# Altium PCB PCB_Project_2.PcbDoc (part 1 of 2)
Units mm, origin at the board's own origin, x right, y up, seen from the top; angles counter-clockwise.
Board outline 50 x 50 mm, 2 copper layers (TOP, BOT), stack 0.273 mm thick; 59 components, 39 nets, 183 pads, 58 vias.
Unrouted connection lines stored in the file: 41.
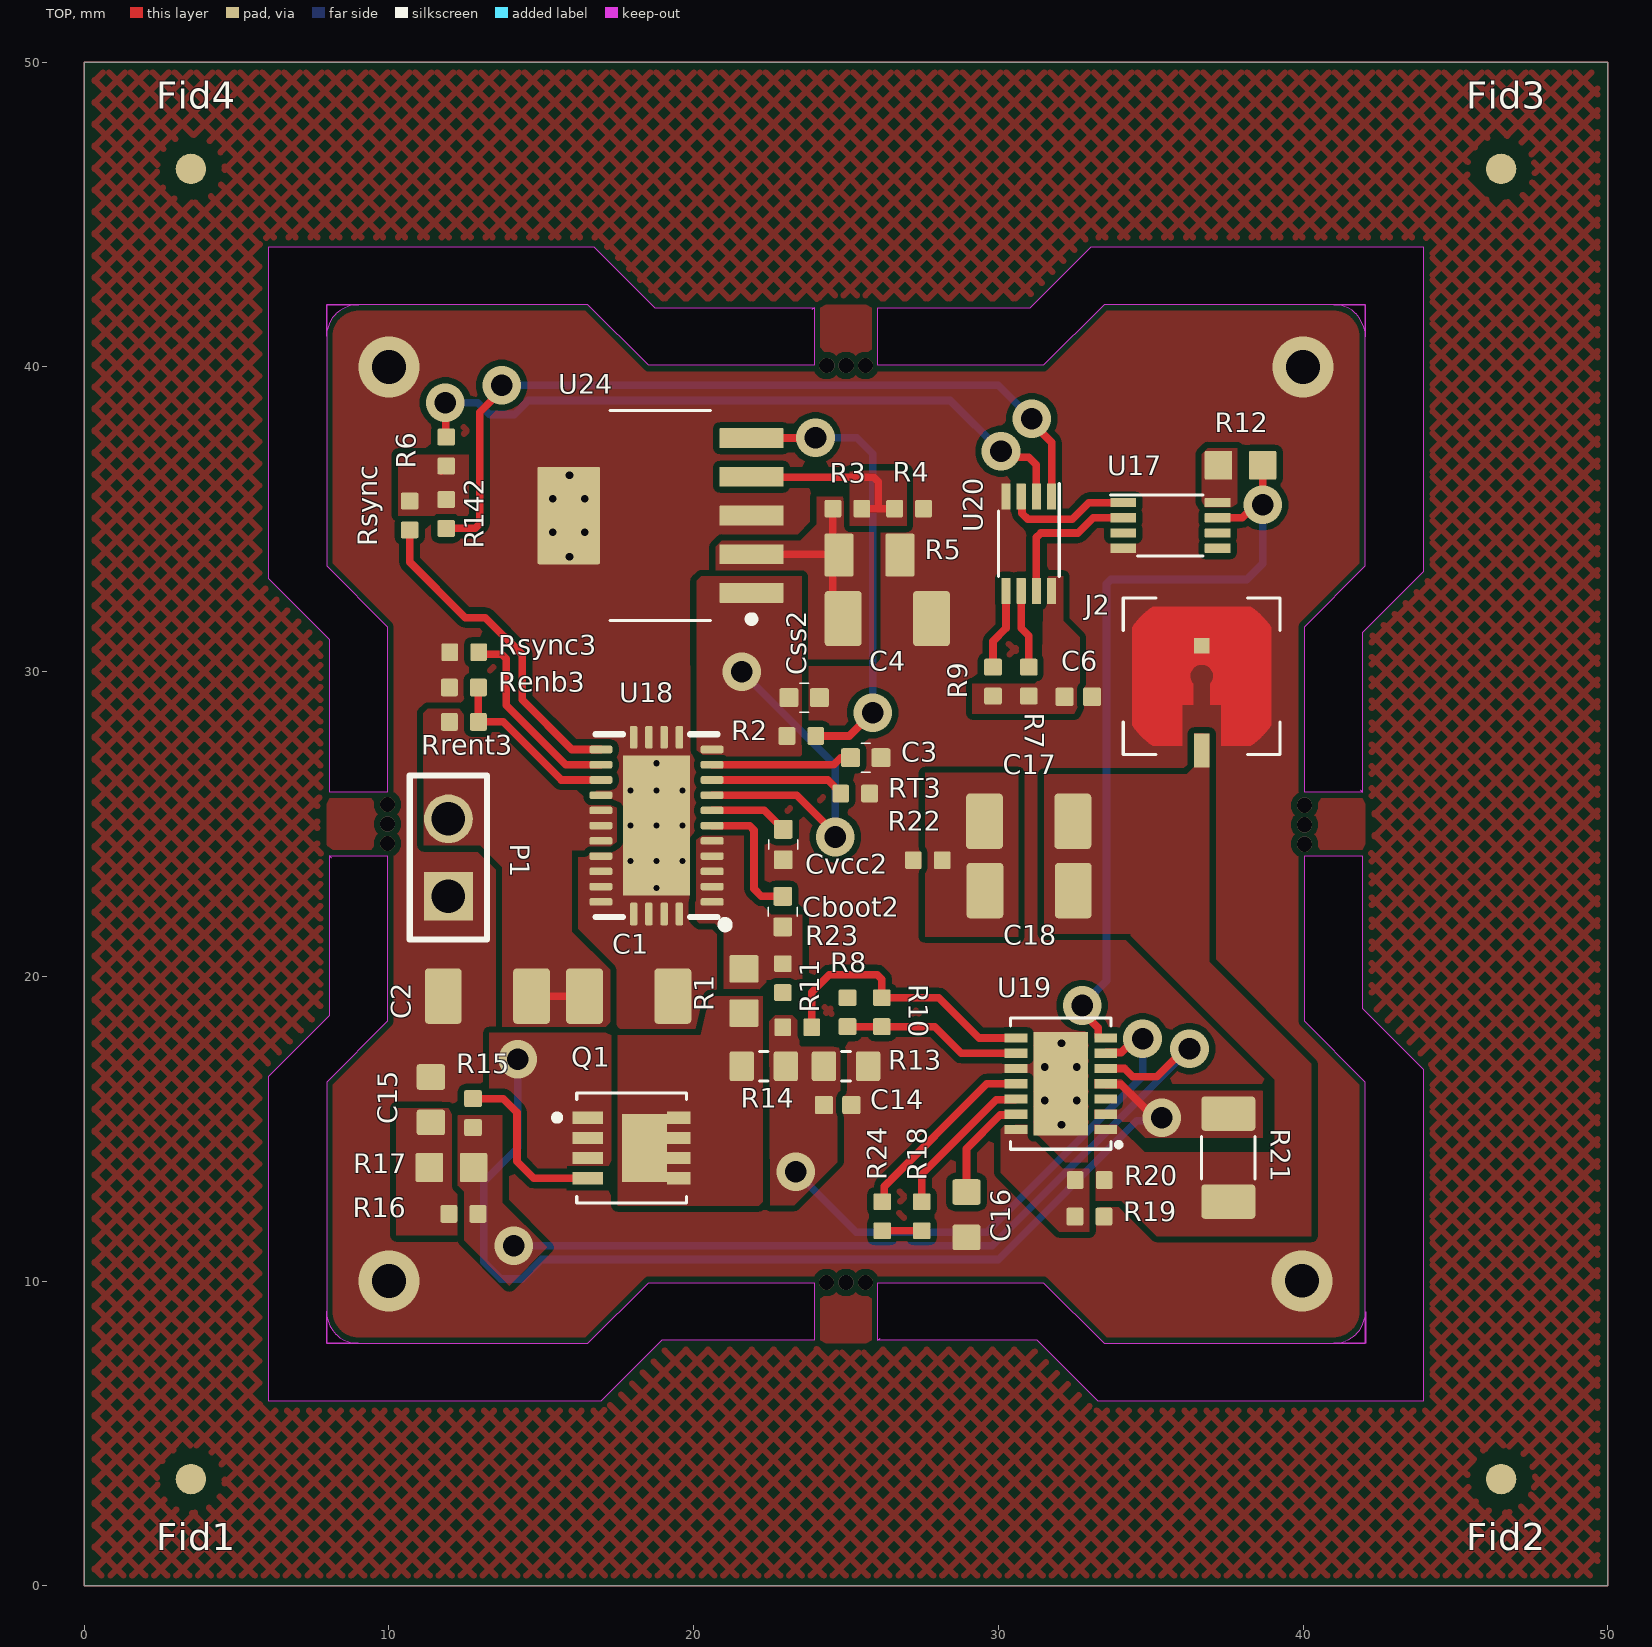
[diagram p0: TOP view]
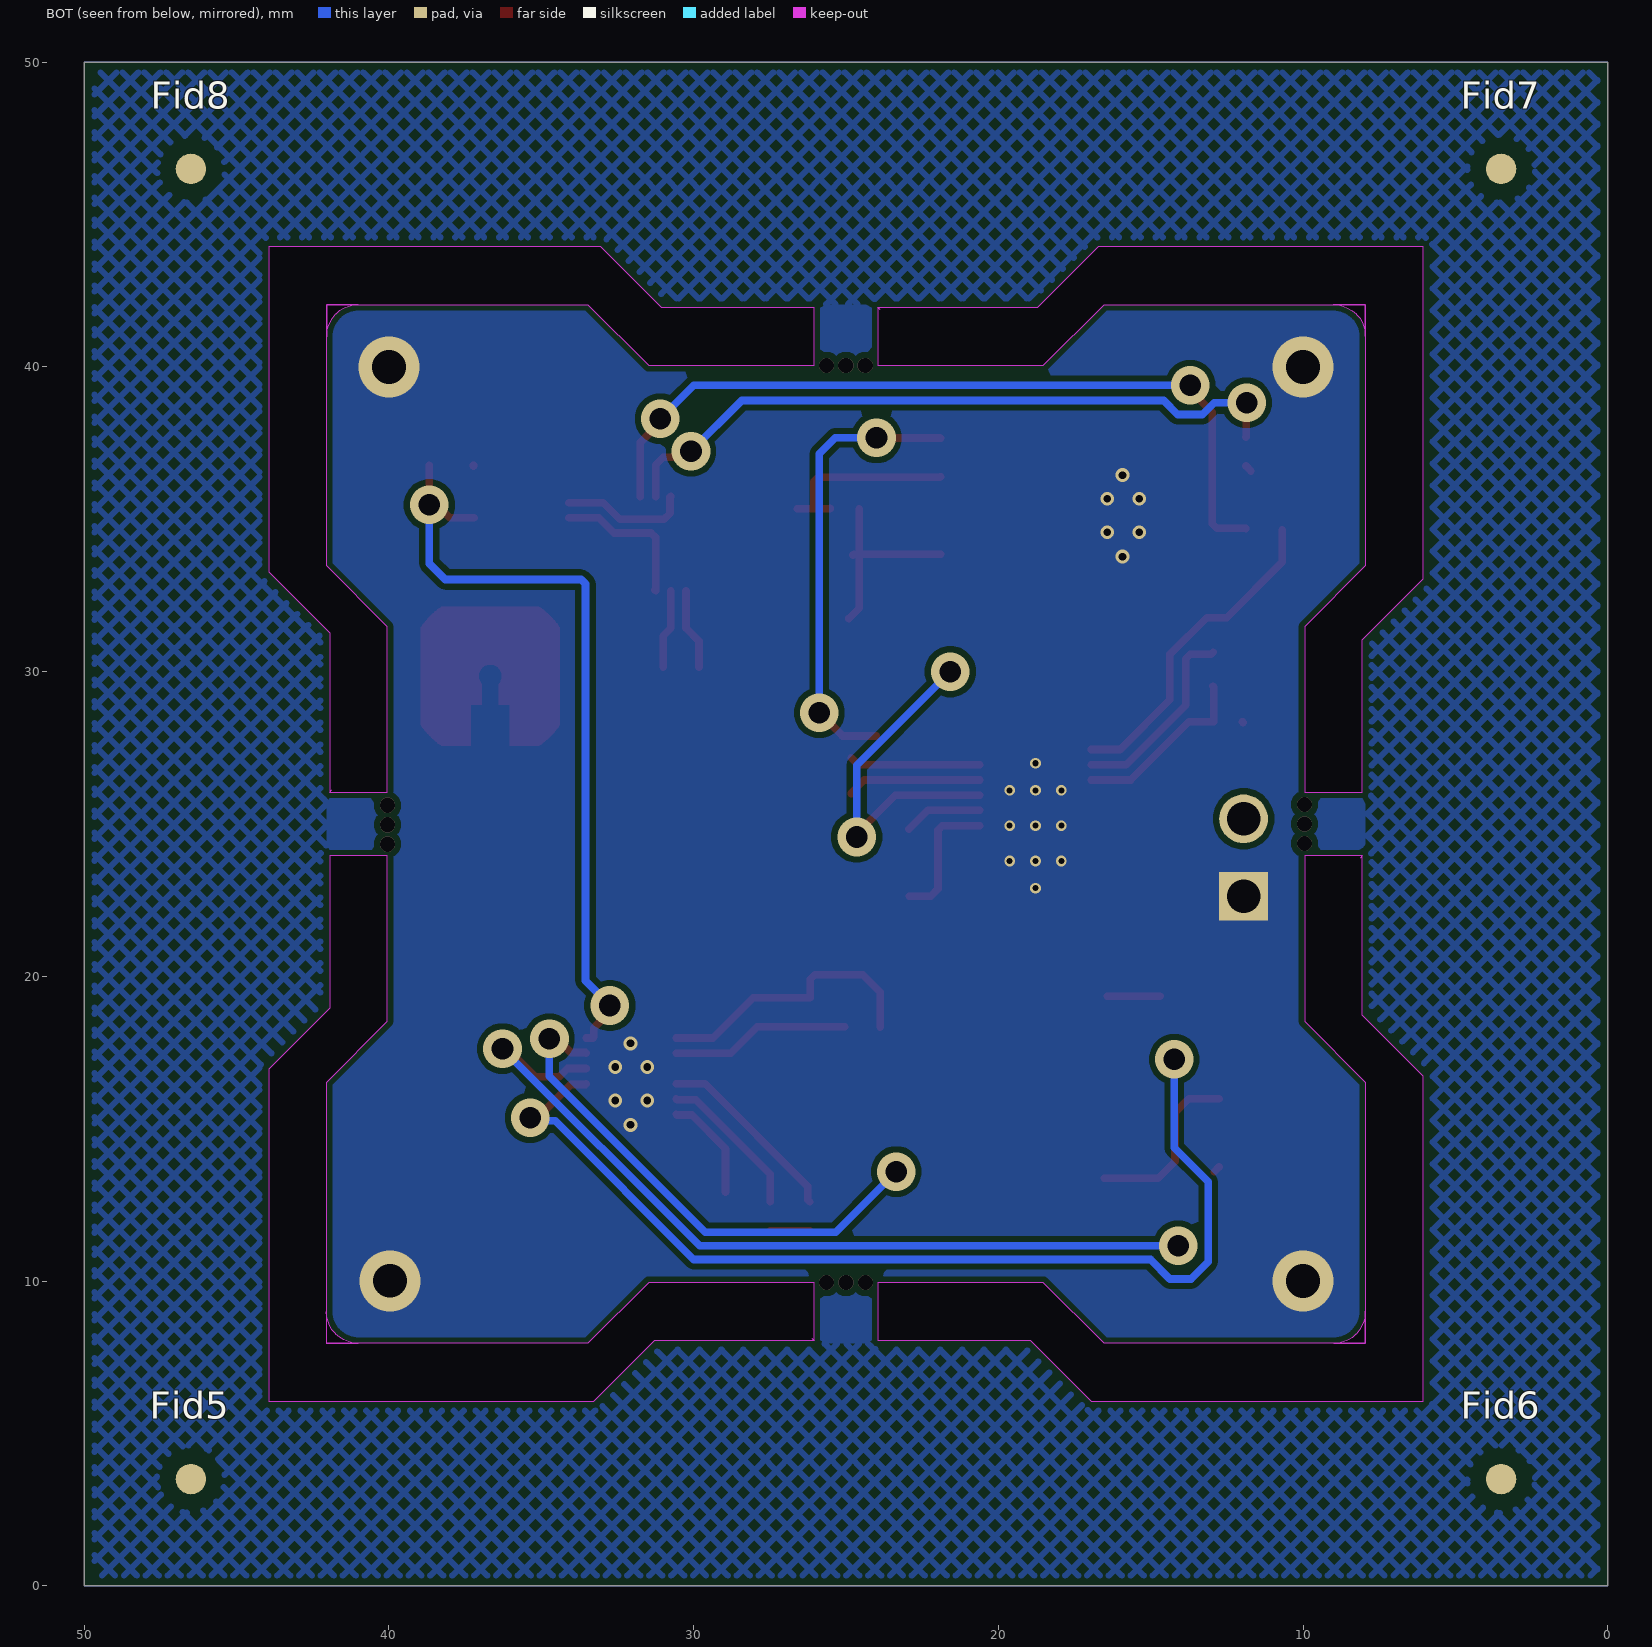
[diagram p1: BOT view, seen from below]
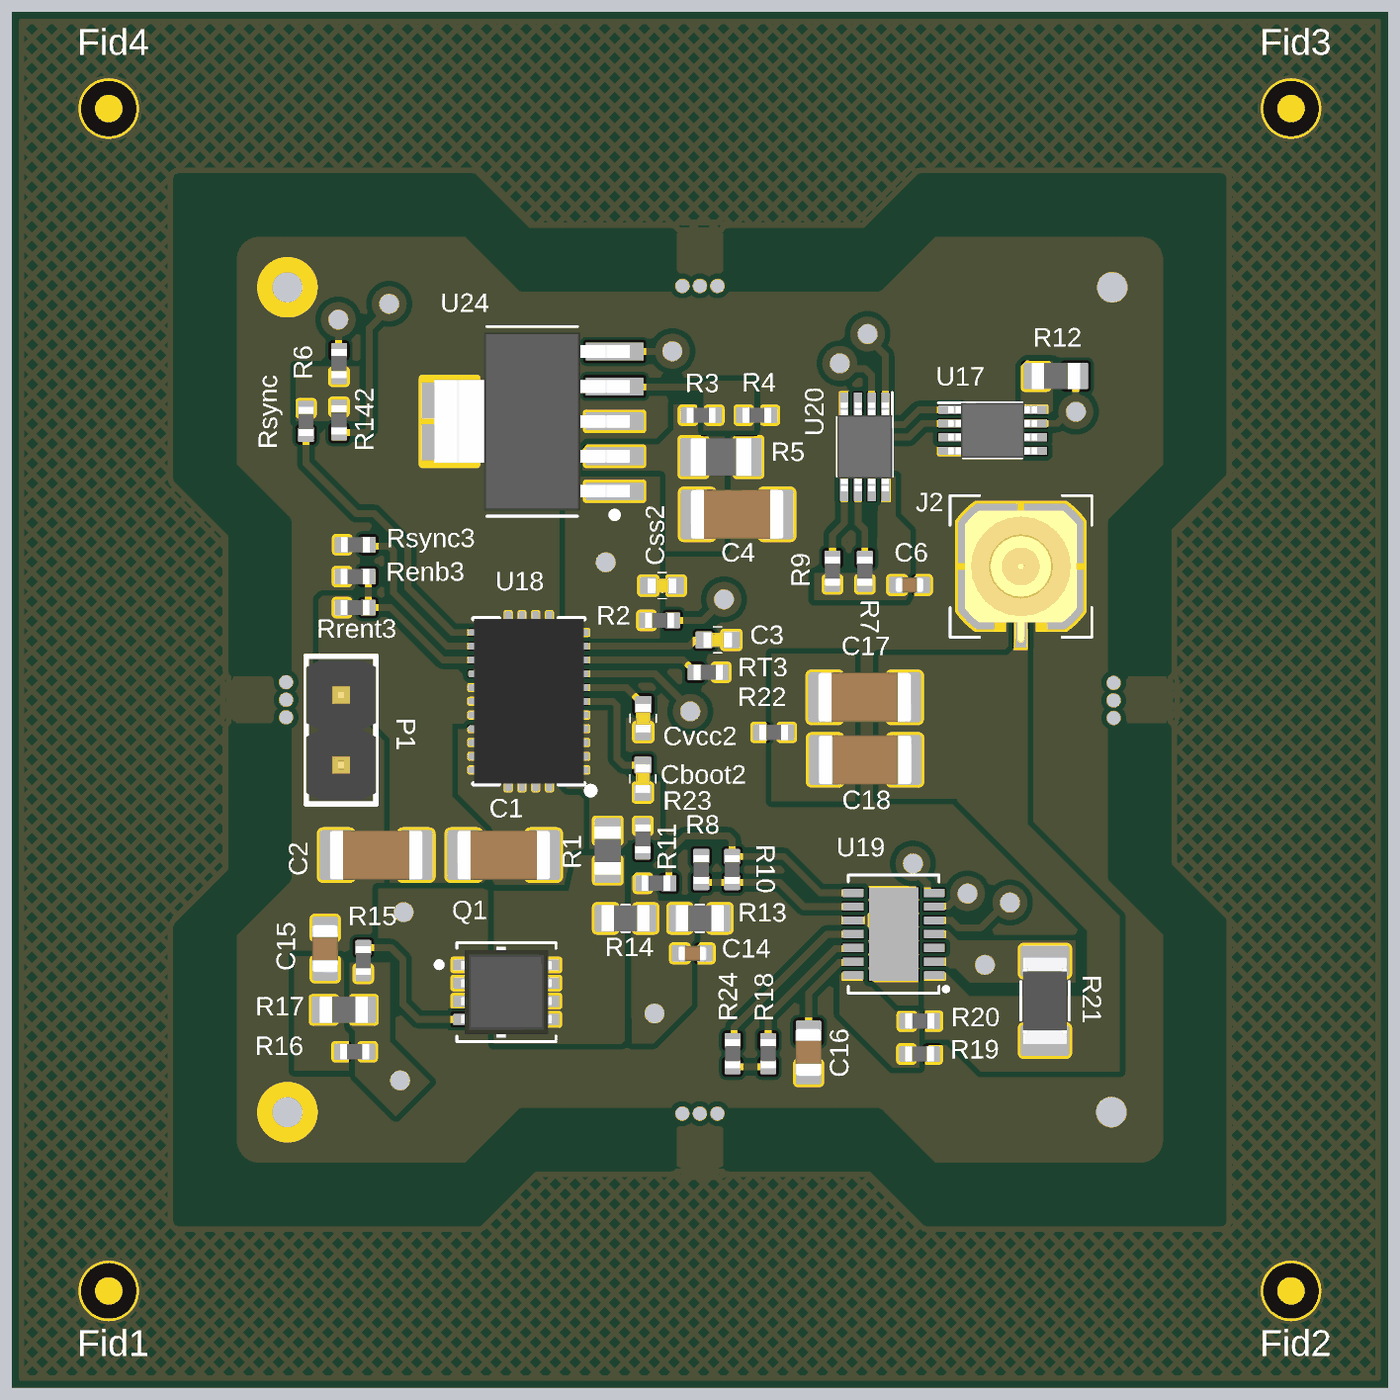
[diagram p2: 3D render of the assembled board from above, using the file's embedded part models]

## Layer stack, top to bottom
Top Solder: solder mask 0.01, Solder Resist, Dk 3.5
TOP: signal copper 0.035
Dielectric 1: core 0.2032, Core-025, Dk 4.6
BOT: signal copper 0.035
Bottom Solder: solder mask 0.01, Solder Resist, Dk 3.5

## Board outline
0,0 0,50 50,50 50,0
cut-out: 41.002,7.95 ccw(c41.002,8.998) 41.743,8.257 41.754,8.269 ccw(c41.036,8.987) 42.052,8.987 42.052,7.95
cut-out: 7.949,8.999 ccw(c8.997,8.999) 8.256,8.258 8.268,8.247 ccw(c8.986,8.965) 8.986,7.949 7.949,7.949
cut-out: 42.05,41 ccw(c41.002,41) 41.743,41.741 41.731,41.753 ccw(c41.013,41.034) 41.013,42.05 42.05,42.05
cut-out: 9,42.05 ccw(c9,41.002) 8.259,41.743 8.247,41.731 ccw(c8.966,41.013) 7.95,41.013 7.95,42.05
cut-out: 23.95,41.95 23.95,40.05 18.525,40.05 16.525,42.05 7.95,42.05 7.95,33.475 9.95,31.475 9.95,26.05 8.05,26.05 8.05,31.05 6.05,33.05 6.05,43.95 16.725,43.95 18.725,41.95 23.95,41.95 23.9,41.9
cut-out: 41.95,26.05 40.05,26.05 40.05,31.475 42.05,33.475 42.05,42.05 33.475,42.05 31.475,40.05 26.05,40.05 26.05,41.95 31.05,41.95 33.05,43.95 43.95,43.95 43.95,33.275 41.95,31.275 41.95,26.05 41.9,26.1
cut-out: 8.05,23.95 9.95,23.95 9.95,18.525 7.95,16.525 7.95,7.95 16.525,7.95 18.525,9.95 23.95,9.95 23.95,8.05 18.95,8.05 16.95,6.05 6.05,6.05 6.05,16.725 8.05,18.725 8.05,23.95 8.1,23.9
cut-out: 26.05,8.05 26.05,9.95 31.475,9.95 33.475,7.95 42.05,7.95 42.05,16.525 40.05,18.525 40.05,23.95 41.95,23.95 41.95,18.95 43.95,16.95 43.95,6.05 33.275,6.05 31.275,8.05 26.05,8.05 26.1,8.1

## Design rules (kind name [scope] priority, off if disabled: settings)
BoardOutlineClearance BoardOutlineClearance_TopSolder [IsPoly and OnTopSolderMask] p1: gap=0 ignorepadtopadclearanceinfootprint=FALSE
BoardOutlineClearance BoardOutlineClearance_botSolder [IsPoly and OnBottomSolderMask] p2: gap=0 ignorepadtopadclearanceinfootprint=FALSE
BoardOutlineClearance [All] p3: gap=0.2 ignorepadtopadclearanceinfootprint=FALSE
Clearance CTRL_UNIT_Clearance [WithinRoom('CTRL_UNIT_FANOUT')] p1: gap=0.1 ignorepadtopadclearanceinfootprint=FALSE
Clearance [All] p2: gap=0.2 ignorepadtopadclearanceinfootprint=TRUE
DiffPairsRouting [All] p1: maxlimit=0.3 minlimit=0.3 mostfreqgap=0.3 toplayer_minwidth=0.3 toplayer_maxwidth=0.3 toplayer_prefwidth=0.3 bottomlayer_minwidth=0.3 bottomlayer_maxwidth=0.3 bottomlayer_prefwidth=0.3 maxuncoupledlength=12.7
FabricationTestPointUsage TestPointUsage [All] p1: valid=0 allowmultiple=FALSE
FabricationTestpoint Testpoint [All] p1: side=3 testpointundercomponent=TRUE minsize=1.016 maxsize=2.54 preferedsize=1.524 minholesize=0 maxholesize=1.016 preferedholesize=0.813 testpointgrid=0.025 allowsidetop=TRUE allowsidebottom=TRUE usegrid=TRUE gridtolerance=0
HoleSize [All] p1: absolutevalues=TRUE maxlimit=5 minlimit=0.025 maxpercent=80.000 minpercent=20.000
HoleToHoleClearance [All] p1: gap=0.25 allowstackedmicrovias=TRUE
MinimumSolderMaskSliver [All] p1: minsoldermaskwidth=0.099
PlaneClearance [All] p1: clearance=0.2
PlaneConnect [All] p1: planeconnectstyle=Direct reliefexpansion=0.508 reliefentries=4 reliefconductorwidth=0.254 reliefairgap=0.254
PolygonConnect [All] p1: connectstyle=Direct reliefconductorwidth=0.254 reliefentries=4 polygonreliefangle="90 Angle" airgapwidth=0.254
RoutingCorners [All] p1: cornerstyle=45-Degree minsetback=1 maxsetback=1
RoutingVias [All] p1: holewidth=0.711 width=1.27 viastyle="Through Hole" minholewidth=0.711 minwidth=1.27 maxholewidth=0.711 maxwidth=1.27 useviatemplates=TRUE viatemplateguid#1={72B07870-E6F0-41A1-9A7A-AF21D1EB57B0} viatemplateguid#2={D1B59875-0DF5-4F30-926D-87D92F6A5A35} viatemplateguid#3={124C3F2C-4E11-4AFE-9AE5-E8E4755D781B} viatemplatename#1=v500h200T viatemplatename#2=v600h300T viatemplatename#3=v50h20m0mx0(Tol10-0)
SilkToSilkClearance [All] p1: silktosilkclearance=0.2
SilkToSolderMaskClearance SilkscreenOverComponentPads [IsPad] p1: minsilkscreentomaskgap=0.05 clearancetoexposedcopper=TRUE
SolderMaskExpansion [All] p1: expansion=0.102 istentingtop=FALSE
SupplyNets "Schematic Supply Nets" [InNet('GND')] p1: voltage=0.000
Width [All] p1: maxlimit=2 minlimit=0.2 preferedwidth=0.25
19 further rules are at their usual default settings.

## Classes and differential pairs
component class SE12: C3 C4 R2 R3 R4 R5 U24
component class SE10: C6 C14 C15 C16 C17 C18 Q1 R6 R7 R8 R9 R10 R11 R12 R13 R14 R15 R16 R17 R18 R19 R20 R21 R22 R24 R142 U17 U19 U20
component class SE05: C1 C2 Cboot2 Css2 Cvcc2 R23 Renb3 Rrent3 Rsync Rsync3 RT3 U18
component class "[01] - PCU_MODULE": R1
component class "[00] - INTERFACES_BOARD": Fid1 Fid2 Fid3 Fid4 Fid5 Fid6 Fid7 Fid8 J2 P1

## Components (designator, comment, footprint, x,y, rotation, side; value= is the part's Value field where it differs from the comment)
C1 "22uF" CAPC320X160X180L55N 17.867,19.35 r180 top
C2 "22uF" CAPC320X160X180L55N 13.23,19.35 r0 top
C3 "" CAPC100X55X55L35N 23.625,29.15 r180 top
C4 "10uF" CAPC320X160X180L55N 26.355,31.744 r180 top
C6 "100nF" CAPC100X50X55L25N 32.625,29.175 r180 top
C14 "100nF" CAPC100X50X55L25N 24.725,15.775 r180 top
C15 "22nF" CAPC160X80X90L35N 11.375,15.95 r90 top
C16 "82nF" CAPC160X80X90L35N 28.955,12.175 r90 top
C17 "10uF" CAPC320X160X180L55N 30.995,25.089 r0 top
C18 "10uF" CAPC320X160X180L55N 31.01,22.813 r0 top
Cboot2 "4.7nF" CAPC100X55X55L35N 22.925,22.125 r270 top
Css2 "22nF" CAPC100X55X55L35N 25.646,27.177 r0 top
Cvcc2 "2.2uF" CAPC100X55X55L35N 22.94,24.325 r270 top
Fid1 "Fiducial_V2" Fiducial 3.5,3.5 r90 top
Fid2 "Fiducial_V2" Fiducial 46.5,3.5 r90 top
Fid3 "Fiducial_V2" Fiducial 46.5,46.5 r90 top
Fid4 "Fiducial_V2" Fiducial 3.5,46.5 r90 top
Fid5 "Fiducial_V2" Fiducial 46.5,3.5 r90 bottom
Fid6 "Fiducial_V2" Fiducial 3.5,3.5 r90 bottom
Fid7 "Fiducial_V2" Fiducial 3.5,46.5 r90 bottom
Fid8 "Fiducial_V2" Fiducial 46.5,46.5 r90 bottom
J2 "SMPM-PC-P-EG-ST-SM-1" SAMTEC_SMPM-PC-P-EG-ST-SM-1 36.675,29.85 r0 top
P1 "61300211121" 61300211121 11.95,23.9 r90 top
Q1 "SI7414DN-T1-GE3" "Vishay PowerPAK 1212-8 package" 17.963,14.365 r0 top
R1 "NoBom" RESC1608X50N 21.65,19.517 r270 top
R2 "0" RESC100X50X40L25N 23.535,27.888 r180 top
R3 "12.7 k" RESC100X50X40L25N 25.045,35.35 r0 top
R4 "4.02 k" RESC100X50X40L25N 27.07,35.35 r180 top
R5 "NoBom" RESC2012X60N 25.769,33.827 r180 top
R6 "4.02 k" RESC100X50X40L25N 11.875,37.225 r270 top
R7 "100K" RESC100X50X40L25N 31,29.675 r270 top
R8 "100K" RESC100X50X40L25N 25.05,18.825 r270 top
R9 "100K" RESC100X50X40L25N 29.825,29.675 r270 top
R10 "54.9 k" RESC100X50X40L25N 26.175,18.825 r90 top
R11 "39K" RESC100X50X40L25N 23.4,18.325 r180 top
R12 "NoBom" RESC1608X50N 37.95,36.775 r180 top
R13 "NoBom" "RESC155X85X55L30N - NO BOM" 25,17.05 r180 top
R14 "0" RESC155X85X55L30N 22.301,17.049 r180 top
R15 "10" RESC100X50X40L25N 12.758,15.512 r90 top
R16 "0" RESC100X50X40L25N 12.443,12.201 r180 top
R17 "NoBom" RESC1608X50N 12.05,13.725 r180 top
R18 "100K" RESC100X50X40L25N 27.485,12.125 r270 top
R19 "4.99 k" RESC100X50X40L25N 32.991,12.115 r180 top
R20 "21K" RESC100X50X40L25N 33,13.314 r0 top
R21 "0R043" RESC315X160X65L50N 37.55,14.05 r270 top
R22 "0R1" RESC100X50X40L25N 27.685,23.813 r0 top
R23 "20K" RESC100X50X40L25N 22.925,19.941 r90 top
R24 "100K" RESC100X50X40L25N 26.19,12.125 r270 top
R142 "0" RESC100X50X40L25N 11.875,35.175 r270 top
Renb3 "0" RESC100X50X40L25N 12.46,29.479 r0 top
Rrent3 "100K" RESC100X50X40L25N 12.46,28.35 r180 top
Rsync "100K" RESC100X50X40L25N 10.676,35.125 r270 top
Rsync3 "0" RESC100X50X40L25N 12.468,30.64 r0 top
RT3 "78.7 k" RESC100X50X40L25N 25.3,26 r0 top
U17 "SN74LVC2G08QDCURQ1" SOP50P310X90-8N 35.65,34.8 r270 top
U18 "TPS7H4010MRNPTSEP" TPS7H4010MRNPTSEP 18.78,24.945 r180 top
U19 "LTC4364HDE-2#PBF" DFN15P50_300X400X80L40X30T175X335 32.05,16.475 r180 top
U20 "SN74LVC2G08QDCURQ1" SOP50P310X90-8N 31,34.2 r180 top
U24 "TPS73801MDCQPSEP" SOT127P706X180-6N 18.9,35.125 r180 top

## Footprints (in the part's own frame and the unit in brackets; to place one, negate y for a bottom-side part, rotate by r counter-clockwise, add the part's x,y. Pads: shape width x height; smd on the part's side, far side on the other; paste and mask are expansions set on the pad)
61300211121 [mm] "Pin Header, pitch 2.54 mm, THT, Vertical, single row, 2p"
  rect 1.6x1.6 hole 1.1: 1(-1.27,0)
  round 1.6 hole 1.1: 2(1.27,0)
  silkscreen extent -2.69,-1.27 2.69,1.27, body extent -2.54,-1.27 2.54,1.27, height 8.57
CAPC100X50X55L25N [mm] "Capacitor, Chip;0402 (metric 1005); 1.00 mm L X 0.50 mm W X 0.55 mm H body"
  rrect20% 0.6x0.6 smd mask+0.1: 1(-0.45,0) 2(0.45,0)
  body extent -0.53,-0.28 0.53,0.28, height 0.55
CAPC100X55X55L35N [mm] "Capacitor, Chip;0402 (metric 1005); 1.05 mm L X 0.55 mm W X 0.55 mm H body"
  rrect20% 0.62x0.62 smd mask+0.1: 1(-0.5,0) 2(0.5,0)
  silkscreen extent -0.15,-0.48 0.15,0.48, body extent -0.53,-0.27 0.53,0.28, height 0.55
CAPC160X80X90L35N [mm] "Capacitor, Chip;0603 (metric 1608); 1.60 mm L X 0.80 mm W X 0.90 mm H body"
  rrect20% 0.84x0.93 smd: 1(-0.745,0) 2(0.745,0)
  body extent -0.87,-0.48 0.87,0.48, height 0.85
CAPC320X160X180L55N [mm] "Capacitor, Chip; 1206 (metric 3216);  3.20 mm L X 1.60 mm W X 1.80 mm H body"
  rrect20% 1.21x1.82 smd: 1(-1.45,0) 2(1.45,0)
  body extent -1.7,-0.9 1.7,0.9, height 1.8
DFN15P50_300X400X80L40X30T175X335 [mm] "DFN, 14 Leads, Pitch=0.50mm, Body=3.00x4.00mm, Height=0.80mm, Thermal Pad=1.75x3.35mm"
  rrect1% 0.75x0.3 smd mask+0.05: 1(-1.475,1.5) 2(-1.475,1) 3(-1.475,0.5) 4(-1.475,0) 5(-1.475,-0.5) 6(-1.475,-1) 7(-1.475,-1.5) 8(1.475,-1.5) 9(1.475,-1) 10(1.475,-0.5) 11(1.475,0) 12(1.475,0.5) 13(1.475,1) 14(1.475,1.5)
  rrect1% 1.8x3.4 smd mask+0.05: 15(0,0)
  silkscreen extent -1.92,-2.15 1.65,2.15, body extent -1.5,-2 1.5,2, height 0.75
Fiducial [mm] "Fiducial"
  round 1 smd paste-1 mask+0.6: 1(0,0)
  TOP pour cut-out: 0,-1 -0.383,-0.924 -0.707,-0.707 -0.924,-0.383 -1,0 -1,0 -0.924,0.383 -0.707,0.707 -0.383,0.924 0,1 0,1 0.383,0.924 0.707,0.707 0.924,0.383 1,0 1,0 0.924,-0.383 0.707,-0.707 0.383,-0.924 0,-1
RESC100X50X40L25N [mm] "Resistor, Chip; 0402 (metric 1005); 1.00 mm L X 0.50 mm W X 0.40 mm H body"
  rrect20% 0.55x0.58 smd: 1(-0.475,0) 2(0.475,0)
  body extent -0.53,-0.28 0.53,0.28, height 0.4
RESC155X85X55L30N [mm] "Resistor, Chip; 0603 (metric 1608);  1.55 mm L X 0.85 mm W X 0.55 mm H body"
  rrect20% 0.8x0.98 smd: 1(-0.725,0) 2(0.725,0)
  silkscreen extent -0.15,-0.48 0.15,0.48, body extent -0.87,-0.48 0.87,0.48, height 0.55
"RESC155X85X55L30N - NO BOM" [mm] "Resistor, Chip; 0603 (metric 1608);  1.55 mm L X 0.85 mm W X 0.55 mm H body"
  rrect20% 0.8x0.98 smd: 1(-0.725,0) 2(0.725,0)
  silkscreen extent -0.15,-0.48 0.15,0.48, body extent -0.87,-0.48 0.87,0.48, height 0.55
RESC315X160X65L50N [mm] "Resistor, Chip; 1206 (metric 3216); 3.15 mm L X 1.60 mm W X 0.65 mm H body"
  rrect20% 1.13x1.77 smd: 1(-1.445,0) 2(1.445,0)
  silkscreen extent -0.7,-0.88 0.7,0.88, body extent -1.58,-0.8 1.58,0.8, height 0.65
RESC1608X50N [mm] "Chip Resistor, EIA 0603, Body=1.60x0.80mm, Height=0.50mm, IPC Medium Density"
  rrect10% 0.9x0.95 smd mask+0.1: 1(-0.725,0) 2(0.725,0)
  body extent -0.87,-0.47 0.88,0.48, height 0.5
RESC2012X60N [mm] "Chip Resistor, EIA 0805, Body=2.00x1.25mm, Height=0.60mm, IPC Medium Density"
  rrect10% 0.95x1.4 smd mask+0.1: 1(-1,0) 2(1,0)
  body extent -1.1,-0.67 1.1,0.68, height 0.6
SAMTEC_SMPM-PC-P-EG-ST-SM-1 [mm] "CONN SMPM PLUG 50 OHM SMD"
  rrect5% 0.51x1.12 smd paste-0.05 mask+0.05: 1(0,-2.435)
  rect 0.5x0.5 smd paste-1 mask+0: 2(0,1)
  TOP region: 162 vertices and 0 holes, not listed, extent -2.285,-2.285 2.285,2.285
  silkscreen extent -2.58,-2.58 2.58,2.58, body extent -2.03,-2.79 2.03,2.03, height 4.08
SOP50P310X90-8N [mm] "SOP,VSSOP8,SOT765-1, 0.50mm pitch; 8 pin, 2.30mm W X 2.00mm L X 0.90mm H body, PC Medium Density"
  rrect10% 0.3x0.85 smd mask+0.05: 1(-0.75,-1.55) 2(-0.25,-1.55) 3(0.25,-1.55) 4(0.75,-1.55) 5(0.75,1.55) 6(0.25,1.55) 7(-0.25,1.55) 8(-0.75,1.55)
  silkscreen extent -1,-1.97 1,1.07, body extent -1,-1.62 1,1.62, height 0.9
SOT127P706X180-6N [mm]
  rrect5% 2.1x0.65 smd: 1(-3,2.54) 2(-3,1.27) 3(-3,0) 4(-3,-1.27) 5(-3,-2.54)
  rrect5% 2.05x3.2 smd paste-2: 6(3,0)
  silkscreen extent -3.1,-3.45 1.65,3.5, body extent -3.55,-3.25 3.55,3.25, height 1.66
TPS7H4010MRNPTSEP [mm]
  rrect50% 0.75x0.25 smd mask-2539.97: 1(-1.825,2.5) 2(-1.825,2) 3(-1.825,1.5) 4(-1.825,1) 5(-1.825,0.5) 6(-1.825,0) 7(-1.825,-0.5) 8(-1.825,-1) 9(-1.825,-1.5) 10(-1.825,-2) 11(-1.825,-2.5) 16(1.825,-2.5) 17(1.825,-2) 18(1.825,-1.5) 19(1.825,-1) 20(1.825,-0.5) 21(1.825,0) 22(1.825,0.5) 23(1.825,1) 24(1.825,1.5) 25(1.825,2) 26(1.825,2.5)
  rrect50% 0.25x0.75 smd mask-2539.97: 12(-0.75,-2.9) 13(-0.25,-2.9) 14(0.25,-2.9) 15(0.75,-2.9) 27(0.75,2.9) 28(0.25,2.9) 29(-0.25,2.9) 30(-0.75,2.9)
  rect 2.2x4.6 smd paste-2539.97: 31(0,0)
  rrect50% 0.98x0.96 on Top Paste: ""(-0.58,1.74) ""(-0.58,0.58) ""(-0.58,-0.58) ""(-0.58,-1.74) ""(0.58,1.74) ""(0.58,0.58) ""(0.58,-0.58) ""(0.58,-1.74)
  silkscreen extent -2.38,-3 2,3.37, body extent -2,-3 2,3, height 0.8
"Vishay PowerPAK 1212-8 package" [mm]
  rect 0.99x0.405 smd: 1(-1.438,0.99) 2(-1.438,0.33) 3(-1.438,-0.33) 4(-1.438,-0.99)
  rect 0.76x0.405 smd: 5(1.547,-0.99) 6(1.547,-0.33) 7(1.547,0.33) 8(1.547,0.99)
  rect 1.475x2.235 smd: 9(0.43,0)
  silkscreen extent -2.54,-1.8 1.8,1.8, body extent -1.65,-1.65 1.65,1.65, height 1.06

## Part data
C1 C2: library part GRM31CC71E226ME15L, "CAP CER 22uF 25V ±20% X7S 1206", Case/Package=340Case, Dielectric=1542DielectricType, Manufacturer=Murata, Max Operating Temperature=125°C, Min Operating Temperature=-55°C, Supplier Part Number=490-GRM31CC71E226ME15LCT-ND, Tolerance=20%, Voltage Rating=25V, Capacitance=22uF, Category="Ceramic Capacitors", ComponentLink1Description=Datasheet, ComponentLink1URL=https://search.murata.co.jp/Ceramy/image/img/A01X/G101/ENG/GRM31CC71E226ME15-01A.pdf, Height=1.9mm, Length=3.2mm, Manufacturer Part Number=GRM31CC71E226ME15L, Material=4241ConductorMaterial, Pricing 1="1=0,92, 10=0,562, 50=0,4202, 100=0,3759, 500=0,30056, 1000=0,27702 (USD)", RoHS=No, Stock 1=3447, Supplier=Digikey, Thickness=1.6mm, Voltage Rating (DC)=25V, Width=1.6mm
C3 Css2: library part GRM155R71E223JA61, "Multilayer Ceramic Capacitor, 0.022 uF, 25 V, ± 5%, X7R, 0402 [1005 Metric]", Manufacturer=Murata, Manufacturer Part Number=GRM155R71E223JA61D, Supplier Part Number=3582812, Category="Ceramic Capacitors", ComponentLink1Description=https://datasheet.ciiva.com/5427/product-5427580.pdf?src-supplier=Mouser, ComponentLink1URL=https://datasheet.ciiva.com/5427/product-5427580.pdf?src-supplier=Mouser, ComponentLink2Description=https://datasheet.ciiva.com/29535/grm155r71e223ka61-01-29535418.pdf?src-supplier=Digikey, ComponentLink2URL=https://datasheet.ciiva.com/29535/grm155r71e223ka61-01-29535418.pdf?src-supplier=Digikey, Material=4241ConductorMaterial, Pricing="10=0,017, 100=0,013, 500=0,012, 2500=0,0118, 5000=0,0115 (EUR)", RoHS=Yes, Stock=11149, Supplier=Farnell
C4 C17 C18: library part C3216X7R1H106K160AC, "CAP CER 10UF 50V X7R 1206", Case Code (Imperial)=1206, Case Code (Metric)=3216, Dielectric=1511DielectricType, Manufacturer=TDK, Max Operating Temperature=125°C, Min Operating Temperature=-55°C, Supplier Part Number 1=71AH3370, Tolerance=10%, Voltage Rating=50V, Capacitance=10uF, Case/Package=1206, Category="Ceramic Capacitors", ComponentLink1Description=https://product.tdk.com/info/en/catalog/datasheets/mlcc_commercial_general_en.pdf?src-supplier=Digikey, ComponentLink1URL=https://product.tdk.com/info/en/catalog/datasheets/mlcc_commercial_general_en.pdf?src-supplier=Digikey, ComponentLink2Description=https://datasheet.octopart.com/C3216X7R1H106K160AC-TDK-datasheet-159617022.pdf?src-supplier=TME, ComponentLink2URL=https://datasheet.octopart.com/C3216X7R1H106K160AC-TDK-datasheet-159617022.pdf?src-supplier=TME, Height=1.9mm, Lead Free=5697LeadFree, Length=3.2mm, Manufacturer Part Number=C3216X7R1H106K160AC, Material=4241ConductorMaterial, Mount="Surface Mount", Packaging="Cut Tape", Pricing 1="1=0,797, 10=0,603, 25=0,57, 50=0,537, 100=0,505 (USD)", RoHS=Yes, RoHS Compliant=Yes, Series=C, Stock 1=19909, Supplier 1=Avnet, Thickness=1.6mm, Voltage Rating (DC)=50V, Width=1.6mm
C6: library part C1005X7R1H104K050BB, "CAP CER 100nF 50V ±10% X7R 0402", Capacitor Type=Ceramic, Manufacturer 1=TDK, Operating Temperature="-55°C ~ 125°C", Package / Case="0402 (1005 Metric)", Supplier Part Number 1=445-5932-1-ND, Temperature Coefficient=X7R, Tolerance=±10%, Voltage Rating=50V, Applications="General Purpose", Capacitance=100nF, Category=Capacitors, ComponentLink1Description=http://www.farnell.com/datasheets/1796654.pdf?src-supplier=Newark, ComponentLink1URL=http://www.farnell.com/datasheets/1796654.pdf?src-supplier=Newark, Description 1="CAP CER 100nF 50V ±10% X7R 0402", Features=-, Footprint Name=CAPC100X50X55L25N, Manufacturer Part Number 1=C1005X7R1H104K050BB, Mounting Type="Surface Mount", Packaging="Cut Tape (CT)", Part Status=Active, RoHS="RoHS Compliant", Supplier 1=Digi-Key
C14: library part C1005X7R1H104K050BB, "CAP CER 100nF 50V ±10% X7R 0402", Case Code (Imperial)=0402, Case Code (Metric)=1005, Dielectric=X7R, Dielectric Material=Ceramic, Manufacturer=TDK, Max Operating Temperature=125°C, Min Operating Temperature=-55°C, Package Quantity=1, Supplier Part Number 1=2427315, Tolerance=10%, Voltage=50V, Capacitance=100nF, Case/Package=0402, Category="Ceramic Capacitors", ComponentLink1Description=https://datasheet.ciiva.com/16427/c1005x7r1h104k050bb-16427685.pdf?src-supplier=Future+Electronics, ComponentLink1URL=https://datasheet.ciiva.com/16427/c1005x7r1h104k050bb-16427685.pdf?src-supplier=Future+Electronics, ComponentLink2Description=https://datasheet.ciiva.com/26285/2983c1005x7r1h104k050bb-26285417.pdf?src-supplier=Onlinecomponents.com, ComponentLink2URL=https://datasheet.ciiva.com/26285/2983c1005x7r1h104k050bb-26285417.pdf?src-supplier=Onlinecomponents.com, ComponentLink3Description=https://datasheet.ciiva.com/22725/1913358-22725480.pdf?src-supplier=Element14, ComponentLink3URL=https://datasheet.ciiva.com/22725/1913358-22725480.pdf?src-supplier=Element14, ComponentLink4Description=https://datasheet.ciiva.com/6292/tdkmlcccaprange-6292410.pdf?src-supplier=Digi-Key, ComponentLink4URL=https://datasheet.ciiva.com/6292/tdkmlcccaprange-6292410.pdf?src-supplier=Digi-Key, ComponentLink5Description=https://datasheet.ciiva.com/22725/1913358-22725482.pdf?src-supplier=Element14, ComponentLink5URL=https://datasheet.ciiva.com/22725/1913358-22725482.pdf?src-supplier=Element14, ComponentLink6Description=https://datasheet.ciiva.com/23802/1796654-23802749.pdf?src-supplier=Newark, ComponentLink6URL=https://datasheet.ciiva.com/23802/1796654-23802749.pdf?src-supplier=Newark, ComponentLink7Description=https://datasheet.ciiva.com/48671/e412-c-48671294.pdf?src-supplier=Avnet, ComponentLink7URL=https://datasheet.ciiva.com/48671/e412-c-48671294.pdf?src-supplier=Avnet, ComponentLink8Description=https://datasheet.ciiva.com/6292/tdkmlcccaprange-6292415.pdf?src-supplier=Digi-Key, ComponentLink8URL=https://datasheet.ciiva.com/6292/tdkmlcccaprange-6292415.pdf?src-supplier=Digi-Key, Construction=Flat, Depth=0.5mm, Height=0.5mm, Lead Free="Lead Free", Length=1mm, Manufacturer Part Number=C1005X7R1H104K050BB, Mount="Surface Mount", Packaging="Tape and Reel", Pricing 1="100=0,04100, 200=0,02500, 500=0,02100, 1000=0,01700 (EUR)", Radiation Hardening=No, Resistor Type=Ceramic, RoHS=Yes, RoHS Compliant=Yes, Series=C, Stock 1=9900, Supplier 1=Rs, Termination=SMD/SMT, Thickness=0.022inch, Voltage Rating=50V, Voltage Rating (DC)=50V, Weight=2.3E-05oz, Width=0.02inch
C15: library part 885012206091, "CAP CER 22nF 50V ±10% X7R 0603", Capacitor Type=Ceramic, Manufacturer 1="Wurth Electronics Inc.", Operating Temperature="-55°C ~ 125°C", Package / Case="0603 (1608 Metric)", Supplier Part Number 1=732-8009-1-ND, Temperature Coefficient=X7R, Tolerance=±10%, Voltage Rating=50V, Applications="General Purpose", Capacitance=22nF, Category=Capacitors, ComponentLink1Description="Online Datasheet", ComponentLink1URL=https://katalog.we-online.de/pbs/datasheet/885012206091.pdf, Description 1="CAP CER 22nF 50V ±10% X7R 0603", Features=-, Footprint Name=CAPC1608X85N, Manufacturer Part Number 1=885012206091, Mounting Type="Surface Mount", Packaging="Cut Tape (CT)", Part Status=Active, RoHS="RoHS Compliant", Supplier 1=Digi-Key
C16: library part KAM15AR71H823KT, "CAP CER 82nF 50V ±10% X7R 0603", Capacitor Type=Ceramic, Manufacturer="KYOCERA AVX", Operating Temperature="-55°C ~ 125°C", Package / Case="0603 (1608 Metric)", Supplier Part Number=478-KAM15AR71H823KTCT-ND, Temperature Coefficient=X7R, Tolerance=±10%, Voltage Rating=50V, Applications="General Purpose", Capacitance=82nF, Category=Capacitors, ComponentLink1Description=Datasheet, ComponentLink1URL=https://datasheets.kyocera-avx.com/AutoMLCCKAM.pdf, Features=-, Footprint Name=CAPC160X80X90L35N, Manufacturer Part Number=KAM15AR71H823KT, Mounting Type="Surface Mount", Packaging="Cut Tape (CT)", Part Status=Active, RoHS="RoHS Compliant", Supplier=Digi-Key
Cboot2: library part GRM155R71E472KA01, "0402 4.7 nF 25 V ±10% Tolerance X7R SMT Multilayer Ceramic Capacitor", Manufacturer=Murata, Manufacturer Part Number=GRM155R71E472KA01D, Supplier Part Number=4326802, Category="Ceramic Capacitors", ComponentLink1Description=https://datasheet.ciiva.com/18184/getdatasheetpartid-129543-18184709.pdf?src-supplier=Verical, ComponentLink1URL=https://datasheet.ciiva.com/18184/getdatasheetpartid-129543-18184709.pdf?src-supplier=Verical, ComponentLink2Description=https://datasheet.ciiva.com/130/product-130032.pdf?src-supplier=Digikey, ComponentLink2URL=https://datasheet.ciiva.com/130/product-130032.pdf?src-supplier=Digikey, ComponentLink3Description=https://datasheet.ciiva.com/16392/product-16392847.pdf?src-supplier=Future+Electronics, ComponentLink3URL=https://datasheet.ciiva.com/16392/product-16392847.pdf?src-supplier=Future+Electronics, ComponentLink4Description=https://datasheet.ciiva.com/2989/product-2989394.pdf?src-supplier=Avnet, ComponentLink4URL=https://datasheet.ciiva.com/2989/product-2989394.pdf?src-supplier=Avnet, ComponentLink5Description=https://datasheet.ciiva.com/2989/product-2989393.pdf?src-supplier=Avnet, ComponentLink5URL=https://datasheet.ciiva.com/2989/product-2989393.pdf?src-supplier=Avnet, ComponentLink6Description=https://datasheet.ciiva.com/130/partnumbering-e-01-130033.pdf?src-supplier=Digikey, ComponentLink6URL=https://datasheet.ciiva.com/130/partnumbering-e-01-130033.pdf?src-supplier=Digikey, ComponentLink7Description=https://datasheet.ciiva.com/130/partnumbering-e-01-130034.pdf?src-supplier=Digikey, ComponentLink7URL=https://datasheet.ciiva.com/130/partnumbering-e-01-130034.pdf?src-supplier=Digikey, Lead Free=5697LeadFree, Material=4241ConductorMaterial, Pins=2NUMBER, Pricing="10=0,015, 100=0,01, 500=0,007, 2500=0,006, 5000=0,0059 (EUR)", RoHS=Yes, Stock=39799, Supplier=Farnell
Cvcc2: library part GRM155D71C225ME11, "Multilayer Ceramic Capacitor, 2.2 uF, 16 V, ± 20%, X7T, 0402 [1005 Metric]", Case/Package=343Case, Dielectric=1545DielectricType, Manufacturer=Murata, Manufacturer Part Number=GRM155D71C225ME11D, Max Operating Temperature=125°C, Min Operating Temperature=-55°C, Supplier Part Number=81-GRM155D71C225ME11, Tolerance=20%, Voltage Rating=16V, Category="Ceramic Capacitors", ComponentLink1Description=https://datasheet.octopart.com/GRM155D71C225ME11D-Murata-datasheet-165579666.pdf?src-supplier=TME, ComponentLink1URL=https://datasheet.octopart.com/GRM155D71C225ME11D-Murata-datasheet-165579666.pdf?src-supplier=TME, Height=650um, Length=1mm, Material=4241ConductorMaterial, Pricing="1=0,17, 10=0,113, 50=0,113, 100=0,073, 1000=0,067, 10000=0,057 (USD)", RoHS=Yes, RoHS Compliant=Yes, Stock=102807, Supplier=Mouser, Thickness=500um, Voltage Rating (DC)=16V, Width=500um
Fid1 Fid2 Fid3 Fid4 Fid5 Fid6 Fid7 Fid8: "Fiducial No Pin", Category=Miscellaneous
J2: "Connector SMPM Plug Catchers Mitt 0Hz to 65GHz 50Ohm Solder Straight Surface Mount Gold", Manufacturer=Samtec, Supplier Part Number 1=200-SMPM-PC-PEGSTSM1, Category=Connectors, ComponentLink1Description=https://datasheet.octopart.com/SMPM-PF-P-EG-ST-SM-1-Samtec-datasheet-158267789.pdf?src-supplier=Sager+Electronics, ComponentLink1URL=https://datasheet.octopart.com/SMPM-PF-P-EG-ST-SM-1-Samtec-datasheet-158267789.pdf?src-supplier=Sager+Electronics, Manufacturer Part Number=SMPM-PC-P-EG-ST-SM-1, Pricing 1="1=15,71, 10=14,83, 25=14,31, 50=13,96, 100=12,66, 250=12,22, 500=11,7625 (USD)", RoHS=No, Stock 1=329, Supplier 1=mouser
P1: "THT Vertical Pin Header WR-PHD, Pitch 2.54 mm, Single Row, 2 pins", Color=Black, Current Rating=3A, Manufacturer="Wurth Electronics", Max Operating Temperature=125°C, Min Operating Temperature=-40°C, Supplier Part Number 1=8281581, Voltage Rating=250V, Category="Headers and Wire Housings", ComponentLink1Description=https://datasheet.ciiva.com/13619/6130xx11121-48870-13619345.pdf?src-supplier=Mouser, ComponentLink1URL=https://datasheet.ciiva.com/13619/6130xx11121-48870-13619345.pdf?src-supplier=Mouser, Connector Type="Male Pin", Contact Gender=Male, Contact Material="Copper Alloy,Copper", Contact Mating Length=0.236inch, Contact Plating=Gold, Gender=Male, Housing Material=PBT, Lead Free="Lead Free", Manufacturer Part Number=61300211121, Mount="Through Hole", Number of Contacts=2, Number of Positions=2, Number of Rows=1, Packaging=Bulk, Pitch=0.1inch, Pricing 1="5=0,14100, 50=0,09700, 100=0,07800, 200=0,07300, 500=0,06800 (USD)", REACH SVHC=Unknown, RoHS=Yes, Stock 1=1855, Supplier 1=RSComponents, Termination="Through Hole"
Q1: "MOSFET N-CH 60V 5.6A PPAK1212-8", Manufacturer="Vishay Siliconix", Supplier Part Number=SI7414DN-T1-GE3CT-ND, Category=MOSFETs, ComponentLink1Description=Datasheet, ComponentLink1URL=https://www.vishay.com/docs/71738/71738.pdf, Manufacturer Part Number=SI7414DN-T1-GE3, Pricing 1="1=2,27, 10=1,455, 100=0,9898, 500=0,79058, 1000=0,72652 (USD)", RoHS=Yes, Stock 1=6579, Supplier=Digikey
R1 R12 R17: library part 1RES_NO_BOM, "Resistore Non in BOM", Category=Resistors
R2 R16 R142: library part CRCW04020000Z0EDC, "RES 0 OHM 1/16W 1% 0402", Manufacturer=Vishay, Operating Temperature="-55 °C ~ 155 °C", Package / Case="0402 (1005 metrico)", Power (Watts)="0,063 W, 1/16 W", Supplier Part Number 1=541-4062-1-ND, Temperature Coefficient="±100 ppm/ °C", Tolerance=±1%, Category=Resistors, ComponentLink1Description=http://www.vishay.com/docs/28773/crcwce3.pdf?src-supplier=Digi-Key, ComponentLink1URL=http://www.vishay.com/docs/28773/crcwce3.pdf?src-supplier=Digi-Key, Composition="Thick Film", Description 1="RES 0 OHM 1/16W 1% 0402", Features="AEC Q100 automotive", Footprint Name=RESC100X50X40L25N, Manufacturer 1=Vishay, Manufacturer Part Number=CRCW04020000Z0EDC, Manufacturer Part Number 1=CRCW04020000Z0EDC, Packaging="Cut Tape (CT)", Part Status=Active, Resistance=0, Supplier 1=Digi-Key
R3: library part CRCW040212K7FKED, "RES 12K7 OHM 1/16W 1% 0402", Manufacturer="Vishay Dale", Operating Temperature="-55 °C ~ 155 °C", Package / Case="0402 (1005 metrico)", Power (Watts)="0,063 W, 1/16 W", Resistance=12K7, Supplier Part Number 1=541-12.7KLCT-ND, Temperature Coefficient="±100 ppm/ °C", Tolerance=±1%, Category=Resistors, ComponentLink1Description=Datasheet, ComponentLink1URL=http://www.vishay.com/docs/20035/dcrcwe3.pdf, Composition="Thick Film", Features="AEC Q100 automotive", Footprint Name=RESC1005X40N, Manufacturer 1="Vishay Dale", Manufacturer Part Number=CRCW040212K7FKED, Manufacturer Part Number 1=CRCW040212K7FKED, Packaging="Cut Tape (CT)", Part Status=Active, Supplier 1=Digi-Key
R4 R6: library part CRCW04024K02FKED, "RES 4K02 OHM 1/16W 1% 0402", Manufacturer="Vishay Dale", Operating Temperature="-55 °C ~ 155 °C", Package / Case="0402 (1005 metrico)", Power (Watts)="0,063 W, 1/16 W", Resistance=4K02, Supplier Part Number 1=541-4.02KLCT-ND, Temperature Coefficient="±100 ppm/ °C", Tolerance=±1%, Category=Resistors, ComponentLink1Description=Datasheet, ComponentLink1URL=http://www.vishay.com/docs/20035/dcrcwe3.pdf, Composition="Thick Film", Features="AEC Q100 automotive", Footprint Name=RESC1005X40N, Manufacturer 1="Vishay Dale", Manufacturer Part Number=CRCW04024K02FKED, Manufacturer Part Number 1=CRCW04024K02FKED, Packaging="Cut Tape (CT)", Part Status=Active, Supplier 1=DigiKey
R5: library part 1RES_NO_BOM_0805, "Resistore Non in BOM", Category=Resistors
R7 R8 R9 R18 R24: library part CRCW0402100KFKEDC, "RES 100K OHM 1/16W 1% 0402", Manufacturer=Vishay, Operating Temperature="-55 °C ~ 155 °C", Package / Case="0402 (1005 metrico)", Power (Watts)="0,063 W, 1/16 W", Supplier Part Number 1=541-3960-1-ND, Temperature Coefficient="±100 ppm/ °C", Tolerance=±1%, Category=Resistors, ComponentLink1Description=Datasheet, ComponentLink1URL=https://www.vishay.com/docs/28773/crcwce3.pdf, Composition="Thick Film", Description 1="RES 100K OHM 1/16W 1% 0402", Features="AEC Q100 automotive", Footprint Name=RESC100X50X40L25N, Manufacturer 1=Vishay, Manufacturer Part Number=CRCW0402100KFKEDC, Manufacturer Part Number 1=CRCW0402100KFKEDC, Packaging="Cut Tape (CT)", Part Status=Active, Resistance=100K, Supplier 1=Digi-Key
R10: library part CRCW040254K9FKED, "RES 54K9 OHM 1/16W 1% 0402", Manufacturer="Vishay Dale", Operating Temperature="-55 °C ~ 155 °C", Package / Case="0402 (1005 metrico)", Power (Watts)="0,063 W, 1/16 W", Resistance=54K9, Supplier Part Number 1=541-54.9KLCT-ND, Temperature Coefficient="±100 ppm/ °C", Tolerance=±1%, Category=Resistors, ComponentLink1Description=Datasheet, ComponentLink1URL=http://www.vishay.com/docs/20035/dcrcwe3.pdf, Composition="Thick Film", Features="AEC Q100 automotive", Footprint Name=RESC1005X40N, Manufacturer 1="Vishay Dale", Manufacturer Part Number=CRCW040254K9FKED, Manufacturer Part Number 1=CRCW040254K9FKED, Packaging="Cut Tape (CT)", Part Status=Active, Supplier 1=DigiKey
R11: library part CRCW040239K0FKED, "RES 39K OHM 1/16W 1% 0402", Manufacturer="Vishay Dale", Operating Temperature="-55 °C ~ 155 °C", Package / Case="0402 (1005 metrico)", Power (Watts)="0,063 W, 1/16 W", Supplier Part Number 1=541-39.0KLCT-ND, Temperature Coefficient="±100 ppm/ °C", Tolerance=±1%, Category=Resistors, ComponentLink1Description=Datasheet, ComponentLink1URL=http://www.vishay.com/docs/20035/dcrcwe3.pdf, Composition="Thick Film", Features="AEC Q100 automotive", Footprint Name=RESC1005X40N, Manufacturer 1="Vishay Dale", Manufacturer Part Number=CRCW040239K0FKED, Manufacturer Part Number 1=CRCW040239K0FKED, Packaging="Cut Tape (CT)", Part Status=Active, Resistance=39K, Supplier 1=DigiKey
R13: library part 1RES_NO_BOM_0603, "Resistore Non in BOM", Category=Resistors
R14: library part RMCF0603ZT0R00, "RES 0 OHM 1/10W 1% 0603", Manufacturer="Stackpole Electronics Inc", Operating Temperature="-55 °C ~ 155 °C", Package / Case="0603 (1608 metrico)", Power (Watts)="0,1 W, 1/10 W", Supplier Part Number 1=RMCF0603ZT0R00CT-ND, Temperature Coefficient="±100 ppm/ °C", Tolerance=±1%, Category=Resistors, ComponentLink1Description=Datasheet, ComponentLink1URL=https://www.seielect.com/catalog/sei-rmcf_rmcp.pdf, Composition="Thick Film", Description 1="RES 0 OHM 1/10W 1% 0603", Features="AEC Q200 automotive", Footprint Name=RESC155X85X55L30N, Manufacturer 1="Stackpole Electronics Inc", Manufacturer Part Number=RMCF0603ZT0R00, Manufacturer Part Number 1=RMCF0603ZT0R00, Packaging="Cut Tape (CT)", Part Status=Active, Resistance=0, Supplier 1=Digi-Key
R15: library part CRCW040210R0FKED, "RES 10 OHM 1/16W 1% 0402", Manufacturer="Vishay Dale", Operating Temperature="-55 °C ~ 155 °C", Package / Case="0402 (1005 metrico)", Power (Watts)="0,063 W, 1/16 W", Supplier Part Number 1=541-10.0LCT-ND, Temperature Coefficient="±100 ppm/ °C", Tolerance=±1%, Category=Resistors, ComponentLink1Description=Datasheet, ComponentLink1URL=http://www.vishay.com/docs/20035/dcrcwe3.pdf, Composition="Thick Film", Features="AEC Q100 automotive", Footprint Name=RESC1005X40N, Manufacturer 1="Vishay Dale", Manufacturer Part Number=CRCW040210R0FKED, Manufacturer Part Number 1=CRCW040210R0FKED, Packaging="Cut Tape (CT)", Part Status=Active, Resistance=10, Supplier 1=Digi-Key
R19: library part CRCW04024K99FKED, "RES 4K99 OHM 1/16W 1% 0402", Manufacturer="Vishay Dale", Operating Temperature="-55 °C ~ 155 °C", Package / Case="0402 (1005 metrico)", Power (Watts)="0,063 W, 1/16 W", Resistance=4K99, Supplier Part Number 1=541-4.99KLCT-ND, Temperature Coefficient="±100 ppm/ °C", Tolerance=±1%, Category=Resistors, ComponentLink1Description=Datasheet, ComponentLink1URL=http://www.vishay.com/docs/20035/dcrcwe3.pdf, Composition="Thick Film", Features="AEC Q100 automotive", Footprint Name=RESC1005X40N, Manufacturer 1="Vishay Dale", Manufacturer Part Number=CRCW04024K99FKED, Manufacturer Part Number 1=CRCW04024K99FKED, Packaging="Cut Tape (CT)", Part Status=Active, Supplier 1=DigiKey
R20: library part CRCW040221K0FKED, "RES 21K OHM 1/16W 1% 0402", Manufacturer="Vishay Dale", Operating Temperature="-55 °C ~ 155 °C", Package / Case="0402 (1005 metrico)", Power (Watts)="0,063 W, 1/16 W", Supplier Part Number 1=541-21.0KLCT-ND, Temperature Coefficient="±100 ppm/ °C", Tolerance=±1%, Category=Resistors, ComponentLink1Description=Datasheet, ComponentLink1URL=http://www.vishay.com/docs/20035/dcrcwe3.pdf, Composition="Thick Film", Features="AEC Q100 automotive", Footprint Name=RESC1005X40N, Manufacturer 1="Vishay Dale", Manufacturer Part Number=CRCW040221K0FKED, Manufacturer Part Number 1=CRCW040221K0FKED, Packaging="Cut Tape (CT)", Part Status=Active, Resistance=21K, Supplier 1=Digi-Key
R21: library part WSTM1206QLR043FNR, "RES 0R043 OHM 1W 1% 1206", Manufacturer=Littelfuse, Supplier Part Number=18-WSTM1206QLR043FNRCT-ND, Category="Chip SMD Resistors", ComponentLink1Description=Datasheet, ComponentLink1URL=https://mm.digikey.com/Volume0/opasdata/d220001/medias/docus/4897/WSTM_Series_3-17-23.pdf, Manufacturer Part Number=WSTM1206QLR043FNR, Pricing 1="1=0,61, 10=0,41, 25=0,34, 50=0,2876, 100=0,2153, 250=0,19176, 500=0,1569, 1000=0,12203, 5000=0,10788 (USD)", Resistance=0R043, RoHS=No, Stock 1=4775, Supplier=Digikey
R22: library part RUT1005FR100CS, "RES 0R1 OHM 1/10W 1% 0402", Manufacturer="Samsung Electro-Mechanics America, Inc.", Operating Temperature="-55°C ~ 155°C", Package / Case="0402 (1005 Metric)", Power (Watts)="0.1W, 1/10W", Supplier Part Number 1=1276-6167-1-ND, Temperature Coefficient=±150ppm/°C, Tolerance=±1%, Category=Resistors, ComponentLink1Description=http://www.samsungsem.com/kr/support/library/product-catalog/__icsFiles/afieldfile/2015/09/22/CHIP_RESISTOR_2015.pdf, ComponentLink1URL=http://www.samsungsem.com/kr/support/library/product-catalog/__icsFiles/afieldfile/2015/09/22/CHIP_RESISTOR_2015.pdf, Composition="Thick Film", Features="Current Sense, Moisture Resistant", Footprint Name=RESC1005X40N, Manufacturer 1="Samsung Electro-Mechanics America, Inc.", Manufacturer Part Number=RUT1005FR100CS, Manufacturer Part Number 1=RUT1005FR100CS, Packaging="Cut Tape (CT)", Part Status=Active, Resistance=0R1, Supplier 1=Digi-Key
R23: library part CRCW040220K0FKED, "RES 20K OHM 1/16W 1% 0402", Manufacturer="Vishay Dale", Operating Temperature="-55 °C ~ 155 °C", Package / Case="0402 (1005 metrico)", Power (Watts)="0,063 W, 1/16 W", Supplier Part Number 1=541-20.0KLCT-ND, Temperature Coefficient="±100 ppm/ °C", Tolerance=±1%, Category=Resistors, ComponentLink1Description=Datasheet, ComponentLink1URL=http://www.vishay.com/docs/20035/dcrcwe3.pdf, Composition="Thick Film", Features="AEC Q100 automotive", Footprint Name=RESC1005X40N, Manufacturer 1="Vishay Dale", Manufacturer Part Number=CRCW040220K0FKED, Manufacturer Part Number 1=CRCW040220K0FKED, Packaging="Cut Tape (CT)", Part Status=Active, Resistance=20K, Supplier 1=Digi-Key
Renb3 Rsync3: library part CRCW0402100KFKED, "RES  100K OHM 1/16W 1% 0402", Manufacturer="Vishay Dale", Operating Temperature="-55 °C ~ 155 °C", Package / Case="0402 (1005 metrico)", Power (Watts)="0,063 W, 1/16 W", Resistance=100K, Supplier Part Number 1=541-100KLCT-ND, Temperature Coefficient="±100 ppm/ °C", Tolerance=±1%, Category=Resistors, ComponentLink1Description=Datasheet, ComponentLink1URL=http://www.vishay.com/docs/20035/dcrcwe3.pdf, Composition="Thick Film", Features="AEC Q100 automotive", Footprint Name=RESC1005X40N, Manufacturer 1="Vishay Dale", Manufacturer Part Number=CRCW0402100KFKED, Manufacturer Part Number 1=CRCW0402100KFKED, Packaging="Cut Tape (CT)", Part Status=Active, Supplier 1=Digi-Key
Rrent3: library part CRCW0402100KFKED, "RES 100K OHM 1/16W 1% 0402", Manufacturer="Vishay Dale", Operating Temperature="-55 °C ~ 155 °C", Package / Case="0402 (1005 metrico)", Power (Watts)="0,063 W, 1/16 W", Supplier Part Number 1=541-100KLCT-ND, Temperature Coefficient="±100 ppm/ °C", Tolerance=±1%, Category=Resistors, ComponentLink1Description=Datasheet, ComponentLink1URL=http://www.vishay.com/docs/20035/dcrcwe3.pdf, Composition="Thick Film", Features="AEC Q100 automotive", Footprint Name=RESC1005X40N, Manufacturer 1="Vishay Dale", Manufacturer Part Number=CRCW0402100KFKED, Manufacturer Part Number 1=CRCW0402100KFKED, Packaging="Cut Tape (CT)", Part Status=Active, Resistance=100K, Supplier 1=Digi-Key
Rsync: library part CRCW0402100KFKED, "RES  100K OHM 1/16W 1% 0402", Manufacturer="Vishay Dale", Operating Temperature="-55 °C ~ 155 °C", Package / Case="0402 (1005 metrico)", Power (Watts)="0,063 W, 1/16 W", Supplier Part Number 1=541-100KLCT-ND, Temperature Coefficient="±100 ppm/ °C", Tolerance=±1%, Category=Resistors, ComponentLink1Description=Datasheet, ComponentLink1URL=http://www.vishay.com/docs/20035/dcrcwe3.pdf, Composition="Thick Film", Features="AEC Q100 automotive", Footprint Name=RESC1005X40N, Manufacturer 1="Vishay Dale", Manufacturer Part Number=CRCW0402100KFKED, Manufacturer Part Number 1=CRCW0402100KFKED, Packaging="Cut Tape (CT)", Part Status=Active, Resistance=100K, Supplier 1=Digi-Key
RT3: library part CRCW040278K7FKED, "RES 78K7 OHM 1/16W 1% 0402", Manufacturer="Vishay Dale", Operating Temperature="-55 °C ~ 155 °C", Package / Case="0402 (1005 metrico)", Power (Watts)="0,063 W, 1/16 W", Resistance=78K7, Supplier Part Number 1=541-78.7KLCT-ND, Temperature Coefficient="±100 ppm/ °C", Tolerance=±1%, Category=Resistors, ComponentLink1Description=Datasheet, ComponentLink1URL=http://www.vishay.com/docs/20035/dcrcwe3.pdf, Composition="Thick Film", Features="AEC Q100 automotive", Footprint Name=RESC1005X40N, Manufacturer 1="Vishay Dale", Manufacturer Part Number=CRCW040278K7FKED, Manufacturer Part Number 1=CRCW040278K7FKED, Packaging="Cut Tape (CT)", Part Status=Active, Supplier 1=DigiKey
U17 U20: "Automotive 2-ch, 2-input, 1.65-V to 5.5-V AND gates 8-VSSOP -40 to 125", Manufacturer="Texas Instruments", Supplier Part Number=296-SN74LVC2G08QDCURQ1CT-ND, Category="Logic Gates", ComponentLink1Description=Datasheet, ComponentLink1URL=https://www.ti.com/lit/ds/symlink/sn74lvc2g08-q1.pdf, Manufacturer Part Number=SN74LVC2G08QDCURQ1, Pricing 1="1=0,47, 10=0,33, 25=0,2944, 100=0,2555, 250=0,237, 500=0,22578, 1000=0,21657 (USD)", RoHS=No, Stock 1=5504, Supplier=Digikey
U18: "Buck Switching Regulator IC Positive Adjustable 1V 1 Output 6A 30-WFQFN Exposed Pad", Manufacturer="Texas Instruments", Supplier Part Number=296-TPS7H4010MRNPTSEP-ND, Category="Integrated Circuits (ICs)", ComponentLink1Description=Datasheet, ComponentLink1URL=https://www.ti.com/lit/ds/symlink/tps7h4010-sep.pdf?ts=1730267059055&ref_url=https%253A%252F%252Fwww.mouser.ca%252F, Manufacturer Part Number=TPS7H4010MRNPTSEP, RoHS=Yes, Supplier=Digikey
U19: "Hot Swap Controller 1-CH 80V N-Channel Positive High Voltage Automotive 14-Pin DFN EP Tube", Manufacturer="Analog Devices / Linear Technology", Supplier Part Number=505-LTC4364HDE-2#PBF-ND, Category="Hot Swap Controllers", ComponentLink2Description=Datasheet, ComponentLink2URL=https://www.analog.com/media/en/technical-documentation/data-sheets/ltc4364-1-4364-2.pdf, Manufacturer Part Number=LTC4364HDE-2#PBF, Pricing 1="1=14,27, 10=10,149, 25=9,0872, 100=7,9018, 250=7,3278, 500=6,9784, 1000=6,8125 (USD)", RoHS=Yes, Stock 1=6155, Supplier=Digikey
U24: "LDO Voltage Regulators Radiation-tolerant, 2.2-V to 20-V input, 1-A adjustable LDO regulator in a plastic package 6-SOT-223 -55 to 125", Current - Output=1A, Manufacturer="Texas Instruments", Operating Temperature="-55°C ~ 125°C", Package / Case="SOT-223 (6)", Supplier Part Number=595-TPS73801MDCQPSEP, Voltage - Input="1.4V ~ -20 V", Voltage - Output="1.21V ~ -20 V", Category=Regulators, ComponentLink1Description=Datasheet, ComponentLink1URL=https://www.ti.com/lit/ds/symlink/tps73801-sep.pdf?ts=1731944378746&ref_url=https%253A%252F%252Fwww.ti.com%252Fproduct%252FTPS73801-SEP, Manufacturer Part Number=TPS73801MDCQPSEP, Mounting Type="Surface Mount", Number of Regulators=1, Packaging="Cut Tape (CT)", Part Status=Active, Regulator Type="Positive Adjustable", RoHS="RoHS Compliant", Supplier=Mouser

## Via types
v1: diameter 1.27/1.27 (per signal layer), hole 0.711, TOP to BOT, tented both sides, 16 vias
v2: diameter 0.5, hole 0.5, TOP to BOT, tented both sides, 15 vias
v3: diameter 0.454, hole 0.254, TOP to BOT, tented bottom, 12 vias
v4: diameter 0.35, hole 0.2, TOP to BOT, tented both sides, 11 vias
v5: diameter 2, hole 1.1, TOP to BOT, 4 vias

## Nets (pads, with @x,y where several pads share a name; then routed paths per layer and width w, separated by ;. In a path a pad name is that pad's centre, name@x,y a point inside that pad or via, vN(x,y) a via of type N, cw(c..) or ccw(c..) an arc to the next point about the centre after c; other vN are vias at no path point)
3V3_AUX: R18.2 R24.2 | length 1.3
  TOP w0.25: R24.2 R18.2
5V7_RF_MOD_OCP_FAULT: R6.1 U20.2 | length 22.8
  TOP w0.25: v1(11.85,38.825) 11.863,38.812 11.863,37.713 R6.1 ; v1(30.088,37.234) 30.283,37.038 31.004,37.038 31.25,36.792 U20.2
  BOT w0.25: v1(11.85,38.825) 12.917,38.825 13.302,38.44 14.115,38.44 14.575,38.9 28.422,38.9 v1(30.088,37.234)
6V5_DIG1_OCP_FAULT: R9.1 U20.5 | length 2.7
  TOP w0.25: R9.1 29.825,31 30.25,31.425 U20.5
+3V3_AUX: R6.2 R142.1 Rsync.1 | length 0.2
  TOP w0.25: R6.2@11.71,36.585 11.71,36.6 11.86,36.75 R6.2
+5V7_OCXO_OCP_FAULT: R24.1 U19.11 | length 6.2
  TOP w0.25: R24.1 26.252,12.662 26.252,13.102 29.625,16.475 U19.11
+5V_AUX: C4.2 R3.1 R5.2 U24.2 | length 6.6
  TOP w0.25: U24.2 24.741,33.855 R5.2 ; R3.1 24.57,32.079 C4.2
+5V_DIG2_OCP_FAULT: R7.1 U20.6 | length 2.6
  TOP w0.25: U20.6 30.75,31.425 31,31.175 R7.1
GND: C1.1 C2.1 C3.1 C4.1 C6.1 C14.1 C15.2 C16.1 Css2.2 Cvcc2.2 J2.2 R4.1 R5.1 R8.1 R13.1 R19.1 R22.1 R23.1 Renb3.1 Rsync3.1 RT3.2 U17.4 U18.12 U18.13 U18.14 U18.15 U18.19 U18.23 U18.24 U18.25 U18.26 U18.27 U18.28 U18.29 U18.30 U18.31 U19.10 U19.15 U20.4 U24.3 U24.6
  other v3: 32.075,15.125 31.525,15.925 32.575,15.925 31.525,17.025 32.575,17.025 32.075,17.8 15.925,33.775 15.375,34.575 16.425,34.575 15.375,35.675 16.425,35.675 15.925,36.45
  other v4: 18.78,22.895 17.93,23.785 18.78,23.785 19.63,23.785 17.93,24.945 18.78,24.945 19.63,24.945 17.93,26.105 18.78,26.105 19.63,26.105 18.78,26.995
  other v5: 10,10 39.967,10.004 10,40 40,40
NetC3_2: C3.2 Cboot2.2 R1.1 R2.2 R23.2 U18.1 U18.2 U18.3 U18.4 U18.5 U18.8 U18.11 U24.1 | length 11.4
  TOP w0.25: U18.8 23.38,25.945 24.65,24.675 v1(24.65,24.575)
  BOT w0.25: v1(21.575,30) 24.65,26.925 v1(24.65,24.575)
NetC6_2: C6.2 R7.2 R9.2 U20.8
NetC14_2: C14.2 R11.2 R13.2 R14.1 U19.6 | length 17
  TOP w0.25: U19.6 33.55,17.5 34.034,17.5 34.484,17.95 v1(34.735,17.95)
  BOT w0.25: v1(23.35,13.59) 25.336,11.604 29.62,11.604 34.735,16.719 v1(34.735,17.95)
NetC15_1: C15.1 R16.2 R17.2
NetC16_2: C16.2 U19.13 | length 3.5
  TOP w0.25: C16.2 28.955,14.339 30.066,15.45 30.55,15.45 U19.13
NetC17_1: C17.1 C18.1 R22.2
NetCboot2_1: Cboot2.1 U18.6 | length 4.4
  TOP w0.25: U18.6 21.834,24.945 21.98,24.799 21.98,22.87 22.225,22.625 Cboot2.1
NetCss2_1: Css2.1 U18.10 | length 4.3
  TOP w0.25: U18.10 24.593,26.945 24.825,27.177
NetCvcc2_1: Cvcc2.1 U18.7 | length 2.6
  TOP w0.25: U18.7 22.32,25.445 Cvcc2.1
NetQ1_1: Q1.1 Q1.2 Q1.3 R21.1 U19.2 U19.4 | length 34.1
  TOP w0.25: U19.4 33.55,16.45 34.034,16.45 35.126,15.358 v1(35.367,15.358)
  BOT w0.25: v1(14.225,17.275) 14.225,14.368 13.115,13.258 13.115,10.627 13.677,10.065 14.365,10.065 15.004,10.704 29.992,10.704 34.543,15.254 35.264,15.254 v1(35.367,15.358)
NetQ1_4: Q1.4 R15.2 | length 5.8
  TOP w0.25: R15.2 13.756,15.987 14.2,15.543 14.2,13.925 14.75,13.375 Q1.4
NetQ1_5: Q1.5 Q1.6 Q1.7 Q1.8 Q1.9 R1.2 R14.2
NetR2_1: R2.1 U24.5 | length 14.9
  TOP w0.25: U24.5 21.905,37.67 23.995,37.67 v1(24,37.675) ; R2.1 25.113,27.888 v1(25.875,28.65)
  BOT w0.25: v1(24,37.675) 25.35,37.675 25.875,37.15 v1(25.875,28.65)
NetR3_2: R3.2 R4.2 U24.4 | length 6.2
  TOP w0.25: U24.4 21.92,36.375 25.912,36.375 26.058,36.229 26.058,35.35 ; R3.2@25.52,35.365 R3.2 26.058,35.35 ; R4.2 26.058,35.35
NetR8_2: R8.2 R10.1 U19.9 | length 5.9
  TOP w0.25: R8.2 R10.1 27.907,18.35 28.782,17.475 U19.9
NetR10_2: R10.2 R11.1 U19.8 | length 9.3
  TOP w0.25: R11.1 23.875,19.475 24.45,20.05 26.029,20.05 26.175,19.904 R10.2 28.05,19.3 29.375,17.975 U19.8
NetR12_2: R12.2 U17.8 | length 0
  TOP w0.25: R12.2@37.225,36.75 R12.2
NetR15_1: R15.1 R16.1 R17.1 U19.5 | length 28.6
  TOP w0.25: R17.1@12.758,13.742 R17.1 R17.1@12.918,13.582 ; U19.5 34.14,16.975 34.215,16.9 34.22,16.9 34.415,16.705 35.205,16.705 36.125,17.625 v1(36.277,17.625)
  BOT w0.25: v1@14.372,11.154 v1(14.096,11.154) 29.806,11.154 v1(36.277,17.625)
NetR18_1: R18.1 U19.12 | length 5
  TOP w0.25: R18.1 27.485,13.505 29.93,15.95 30.55,15.95 U19.12
NetR19_2: R19.2 R20.1 U19.14
NetR142_2: R142.2 U20.1 | length 26.7
  TOP w0.25: R142.2 11.887,34.712 12.829,34.712 12.975,34.859 12.975,38.52 13.7,39.245 v1(13.7,39.4) ; v1(31.1,38.3) 31.1,38.172 31.75,37.522 U20.1
  BOT w0.25: v1(13.7,39.4) 30,39.4 v1(31.1,38.3)
NetRenb3_2: Renb3.2 Rrent3.1 U18.18 | length 6
  TOP w0.25: Renb3.2 Rrent3.1 13.75,28.35 15.655,26.445 U18.18 ; Renb3.2@12.948,29.513 Renb3.2@12.96,29.525
NetRsync3_2: Rsync3.2 U18.17 | length 6.4
  TOP w0.25: Rsync3.2 13.008,30.575 13.704,30.575 13.85,30.429 13.85,28.9 15.805,26.945 U18.17
NetRsync_2: Rsync.2 U18.16 | length 10.8
  TOP w0.25: Rsync.2 10.676,33.599 12.5,31.775 13.163,31.775 14.375,30.563 14.375,29.075 16.005,27.445 U18.16
NetRT3_1: RT3.1 U18.9 | length 4.4
  TOP w0.25: U18.9 24.395,26.445 24.825,26.015 RT3.1
NetU17_1: U17.1 U20.3 | length 4.2
  TOP w0.25: U20.3 30.775,35.725 30.775,35.199 30.974,35 32.425,35 32.975,35.55 U17.1
NetU17_2: U17.2 U20.7 | length 4.9
  TOP w0.25: U20.7@31.275,32.675 U20.7 31.25,34.404 31.396,34.55 32.611,34.55 33.111,35.05 U17.2
OCXO_+5V7: C17.2 C18.2 J2.1 R20.2 R21.2 U19.1
OUT_DCDC_+12V: C1.2 C2.2 P1.2 Rrent3.2 U18.20 U18.21 U18.22 | length 1.8
  TOP w0.25: P1.2 P1.2@11.967,25.188 ; Rrent3.2@11.967,28.333 Rrent3.2 ; C2.2 C1.2
PWR_RTN: P1.1
S\H\D\N\_\L\T\C\4\3\6\3\_\5\V\7\_\O\C\X\O\: R12.1 U17.7 U19.7 | length 26
  TOP w0.25: v1(32.75,19.043) 32.75,18.83 33.275,18.304 33.275,18 33.3,17.975 U19.7 ; U17.7 38,35.05 38.425,35.475 v1(38.675,35.475) R12.1
  BOT w0.25: v1(32.75,19.043) 32.75,19.054 33.55,19.854 33.55,32.879 33.696,33.025 38.15,33.025 38.675,33.55 v1(38.675,35.475)
pads on no net: Fid1.1 Fid2.1 Fid3.1 Fid4.1 Fid5.1 Fid6.1 Fid7.1 Fid8.1 U17.3 U17.5 U17.6 U18. U19.3
copper on no net:
  other v2: 24.363,9.95 25,9.95 25.638,9.95 40.05,24.338 9.95,24.363 40.05,24.975 9.95,25 40.05,25.613 9.95,25.638 24.363,40.05 24.367,40.052 25,40.05 25.005,40.052 25.638,40.05 25.642,40.052

## Polygon pours and split planes (outlines as drawn)
GND on BOT "NONET_L-01_P-001" (hatched 45Degree grid 0.508 track 0.203, pour order 171): 0.083,50 50,50 50,0 0,0
GND on BOT "NONET_L-01_P-001" (solid, pour order 169): 7.95,42.05 42.05,42.05 42.05,7.949 7.949,7.949
no net on BOT "NONET_L-01_P-001" (hatched 45Degree grid 0.508 track 0.203, remove dead copper, shelved, pour order 126): 0,50 50,50 50,0 0,0
no net on TOP "NONET_L-01_P-001" (hatched 45Degree grid 0.508 track 0.203, pour order 173): 0,50 50,50 50,0 0,0
GND on TOP "NONET_L-01_P-001" (solid, pour order 168): 7.95,42.05 42.05,42.05 42.05,7.95 7.949,7.95 7.949,7.949
no net on TOP "NONET_L-01_P-001" (hatched 45Degree grid 0.508 track 0.203, shelved, pour order 170): 0,50 50,50 50,0 0,0
+3V3_AUX on TOP "NONET_L-01_P-001" (solid, pour order 139): 10.3,37.125 12.625,37.125 12.625,35.175 12.575,35.125 10.3,35.125
NetC3_2 on TOP "NONET_L-01_P-001" (solid, pour order 140): 20.104,27.225 23.5,27.225 23.55,27.275 23.55,33.125 20.1,33.125
NetC3_2 on TOP "NONET_L-01_P-001" (solid, pour order 141): 20.056,24.664 20.077,24.644 21.706,24.644 21.706,22.874 22.551,22.029 23.567,22.029 23.567,19.917 23.587,19.897 23.577,19.887 22.38,19.887 22.38,19.806 22.148,19.575 22.138,19.585 20.982,19.585 20.982,21.466 20.7,21.747 20.046,21.747
NetR3_2 on TOP "NONET_L-01_P-001" (solid, pour order 142): 25.1,36.6 25.131,36.569 25.131,34.786 26.996,34.786 26.987,34.795 26.987,36.597 25.128,36.597 25.125,36.6
NetQ1_5 on TOP "NONET_L-01_P-001" (solid, pour order 143): 20.525,19.35 20.532,19.343 22.264,19.343 22.264,12.601 22.138,12.475 17.504,12.475 17.504,18.058 20.226,18.058
NetR15_1 on TOP "NONET_L-01_P-001" (solid, pour order 144): 12.265,15.436 13.725,15.436 13.725,12.575 15.2,11.1 13.948,9.848 12.464,11.333 12.464,12.923 12.265,13.121
NetQ1_1 on TOP "NONET_L-01_P-001" (solid, pour order 145): 13.292,13.672 17.333,13.672 17.333,18.142 13.292,18.142 13.292,16.951
NetC15_1 on TOP "NONET_L-01_P-001" (solid, pour order 146): 11.722,15.677 10.243,15.677 10.243,11.5 12.243,11.5 12.243,12.902 12.243,15.653